# Altium PCB Gyro_Mode.PcbDoc
Units mm, origin at the board's own origin, x right, y up, seen from the top; angles counter-clockwise.
Board outline 70 x 86 mm, 2 copper layers (Top Layer, Bottom Layer); 35 components, 99 nets, 270 pads, 92 vias.
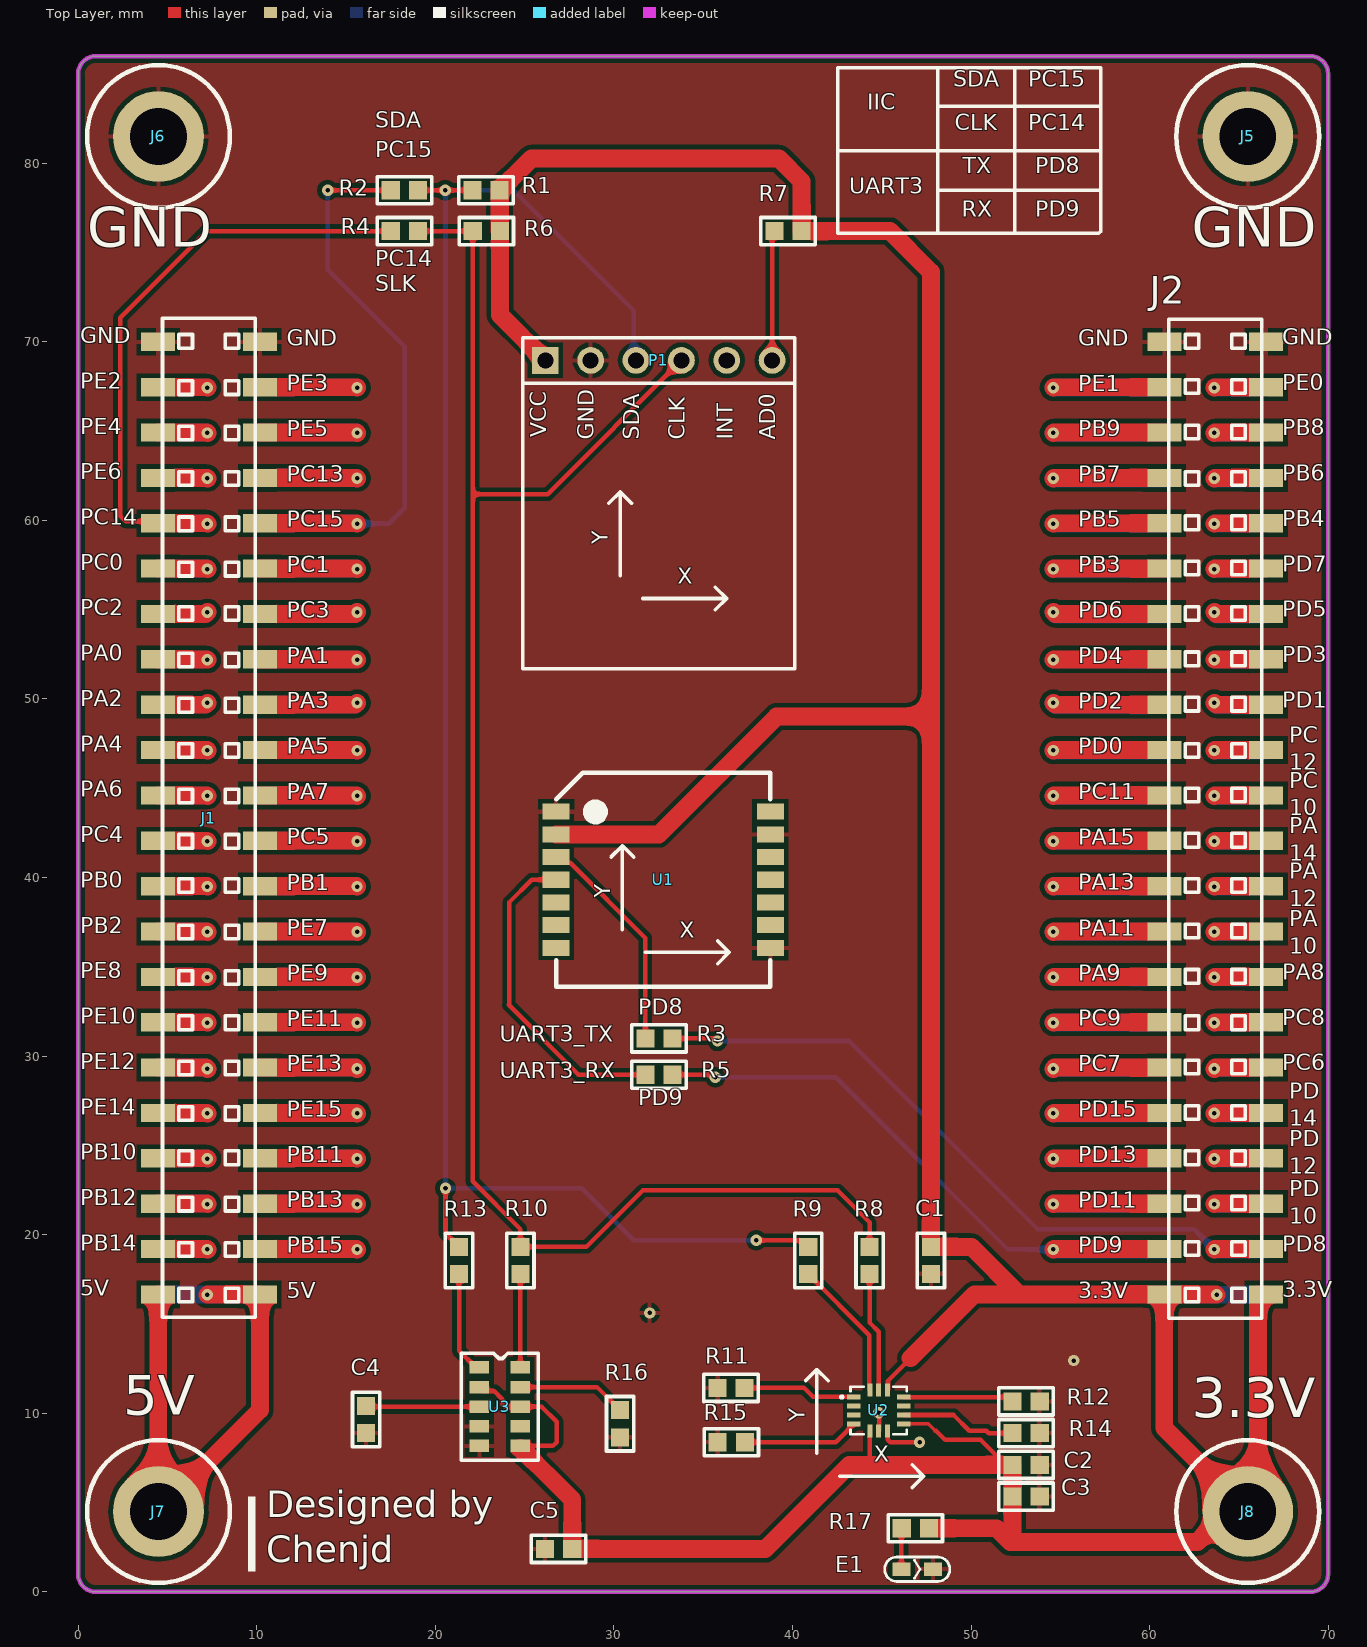
[diagram p0: Top Layer view]
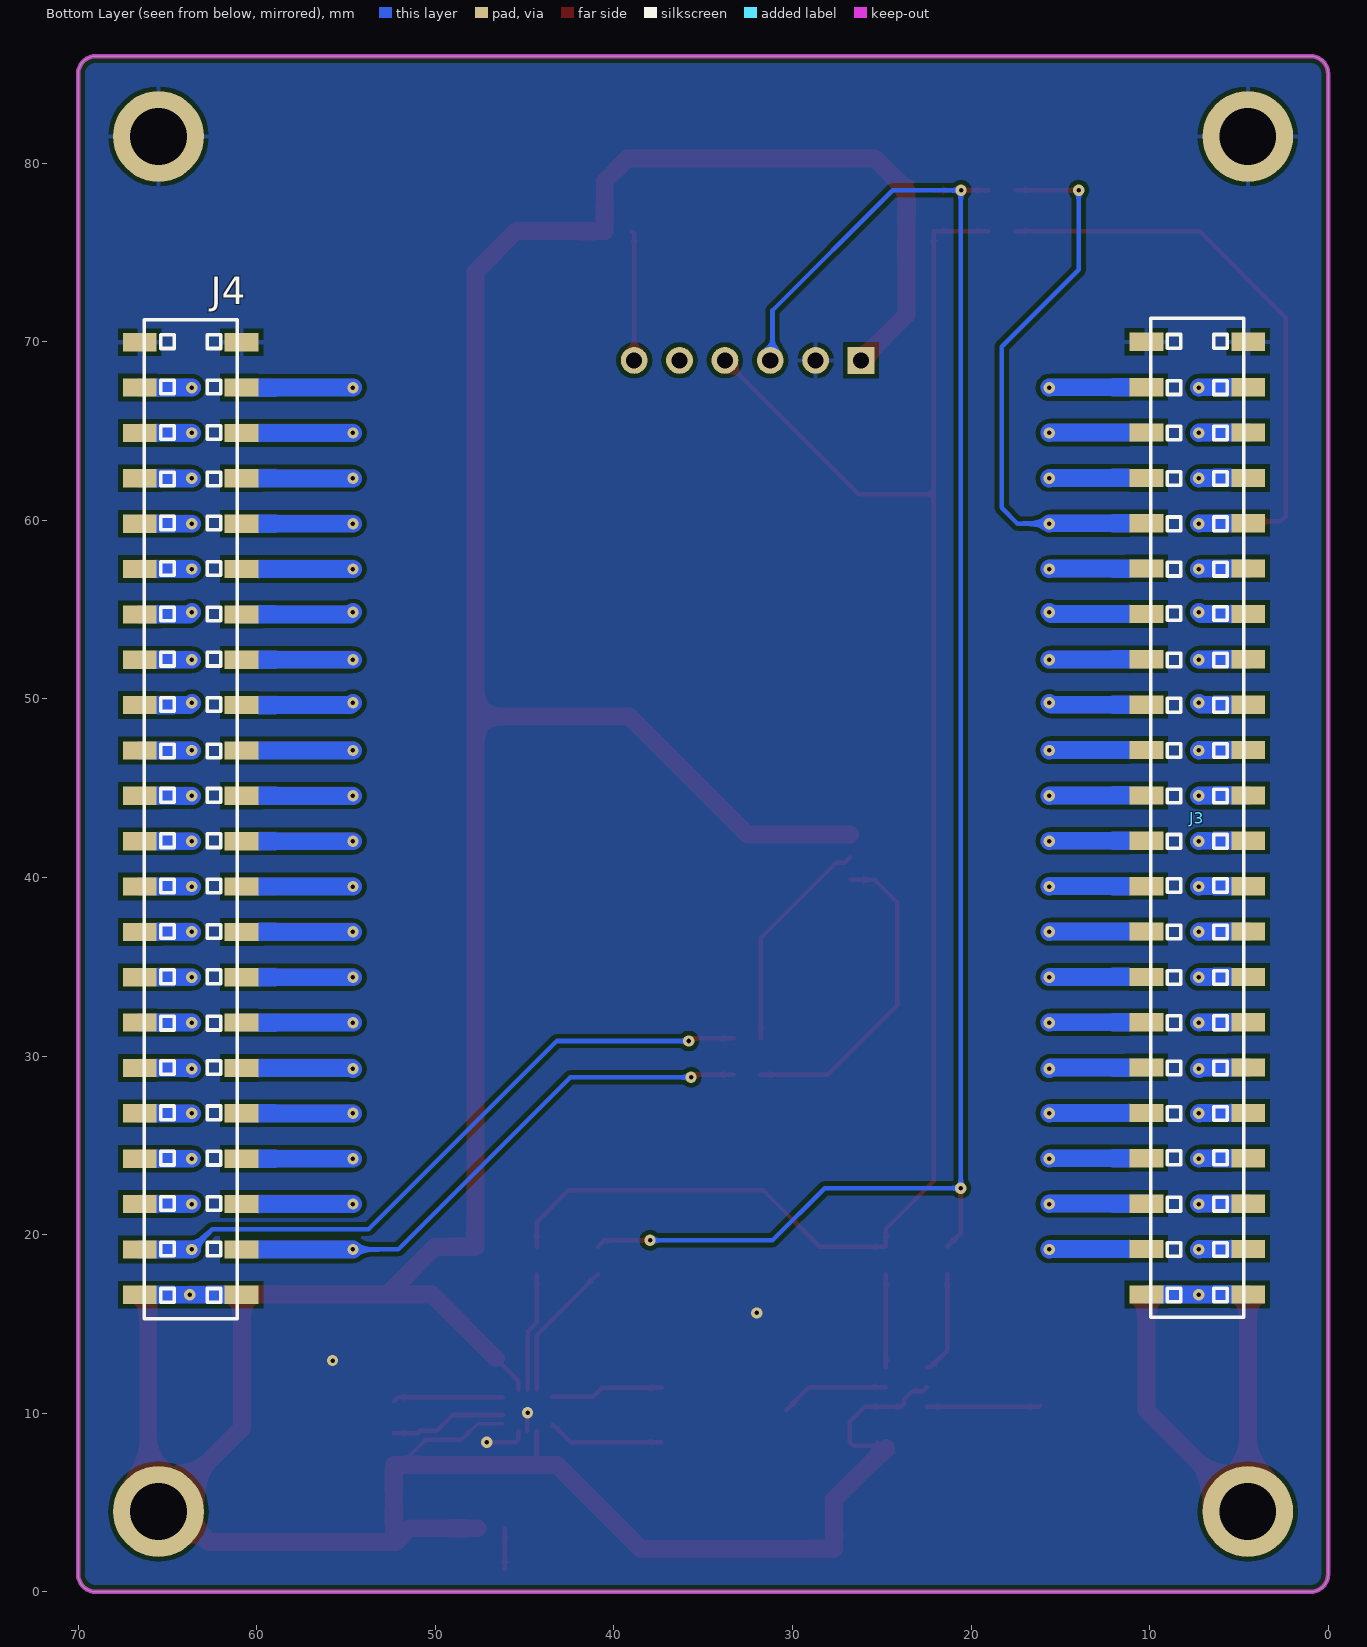
[diagram p1: Bottom Layer view, seen from below]

## Layer stack, top to bottom
Top Solder: solder mask 0.0102, Solder Resist, Dk 3.5
Top Layer: signal copper 0.0356
Dielectric 1: dielectric 0.32, FR-4, Dk 4.8
Bottom Layer: signal copper 0.0356
Bottom Solder: solder mask 0.0102, Solder Resist, Dk 3.5

## Board outline
0,1 0,85 cw(c1,85) 1,86 69,86 cw(c69,85) 70,85 70,1 cw(c69,1) 69,0 1,0 cw(c1,1)

## Design rules (kind name [scope] priority, off if disabled: settings)
Clearance [All] p1: gap=0.254 ignorepadtopadclearanceinfootprint=FALSE except(0: Arc-Hole Track-Hole SMDPad-Hole THPad-Hole Via-Hole Fill-Hole Poly-Hole Region-Hole Text-Hole)
PolygonConnect [All] p1: connectstyle=Relief reliefconductorwidth=0.254 reliefentries=4 polygonreliefangle="90 Angle" airgapwidth=0.254
RoutingVias [All] p1: holewidth=0.711 width=1.27 viastyle="Through Hole" minholewidth=0.711 minwidth=1.27 maxholewidth=0.711 maxwidth=1.27
SolderMaskExpansion [All] p1: expansion=0.102 istentingtop=FALSE
Width [All] p1: maxlimit=1 minlimit=0.254 preferedwidth=0.254
30 further rules are at their usual default settings.

## Components (designator, comment, footprint, x,y, rotation, side; value= is the part's Value field where it differs from the comment)
C1 "10uF" 0603 47.746,17.815 r90 top
C2 "10uF" 0603 53.831,7.106 r180 top
C3 "10uF" 0603 53.831,5.328 r180 top
C4 "10uF" 0603 16.123,8.907 r90 top
C5 "10uF" 0603 26.162,2.413 r0 top
E1 "LED" LED_0603L 45.847,1.27 r0 top
J1 "Pin HDR2X22" "PIN HDR2X22/2.54SMD" 6,70 r270 top
J2 "Pin HDR2X22" "PIN HDR2X22/2.54SMD" 65,16.66 r90 top
J3 "Pin HDR2X22" "PIN HDR2X22/2.54SMD" 8.652,70 r270 bottom
J4 "Pin HDR2X22" "PIN HDR2X22/2.54SMD" 62.372,16.637 r90 bottom
J5 "J?" 固定柱 65.5,81.5 r0 top
J6 "J?" 固定柱 4.5,81.5 r0 top
J7 "J?" 固定柱 4.5,4.5 r0 top
J8 "J?" 固定柱 65.5,4.5 r0 top
P1 "ATK-MPU6050" ATK-MPU6080 26.162,68.961 r0 top
R1 "10K" 0603 22.098,78.492 r0 top
R2 "0" 0603 17.526,78.492 r0 top
R3 "0" 0603 33.274,30.988 r180 top
R4 "0" 0603 17.526,76.206 r0 top
R5 "0" 0603 33.274,28.956 r180 top
R6 "10K" 0603 23.605,76.194 r180 top
R7 "0" 0603 40.496,76.194 r180 top
R8 "0" 0603 44.326,19.304 r270 top
R9 "0" 0603 40.894,19.304 r270 top
R10 "0" 0603 24.771,19.304 r270 top
R11 "5k" 0603 35.814,11.43 r0 top
R12 "0" 0603 52.341,10.674 r0 top
R13 "0" 0603 21.336,19.304 r270 top
R14 "10k" 0603 52.341,8.896 r0 top
R15 "10k" 0603 35.831,8.388 r0 top
R16 "10k" 0603 30.353,10.16 r270 top
R17 "10k" 0603 47.625,3.556 r180 top
U1 "HI2XX" HI2XX_PLCC28 32.766,39.878 r0 top
U2 "ICM40608" ICM40608-LGA-14 44.831,10.16 r0 top
U3 "XV7001" XV7001 24.765,12.571 r270 top

## Footprints (in the part's own frame and the unit in brackets; to place one, negate y for a bottom-side part, rotate by r counter-clockwise, add the part's x,y. Pads: shape width x height; smd on the part's side, far side on the other; paste and mask are expansions set on the pad)
0603 [mil] "0603封装"
  rect 40x40 smd: 1(-0.68,-0.23) 2(59.32,-0.23)
  silkscreen extent -31,-30 89,30, body extent -1,-16 62,16, height 18
ATK-MPU6080 [mm]
  rect 1.5x1.5 hole 0.9: 1(0,0)
  round 1.5 hole 0.9: 2(2.54,0) 3(5.08,0) 4(7.62,0) 5(10.16,0) 6(12.7,0)
  silkscreen extent -1.27,-17.27 13.97,1.27
HI2XX_PLCC28 [mm]
  rect 1.5x0.9 smd: 5(-6,3.81) 6(-6,2.54) 7(-6,1.27) 8(-6,0) 9(-6,-1.27) 10(-6,-2.54) 11(-6,-3.81) 19(6,-3.81) 20(6,-2.54) 21(6,-1.27) 22(6,0) 23(6,1.27) 24(6,2.54) 25(6,3.81)
  silkscreen extent -6,-6 6,6
ICM40608-LGA-14 [mm]
  rect 0.745x0.28 smd: 1(-1.398,0.75) 2(-1.398,0.25) 3(-1.398,-0.25) 4(-1.398,-0.75) 8(1.398,-0.75) 9(1.398,-0.25) 10(1.398,0.25) 11(1.398,0.75)
  rect 0.28x0.745 smd: 5(-0.5,-1.147) 6(0,-1.147) 7(0.5,-1.147) 12(0.5,1.147) 13(0,1.147) 14(-0.5,1.147)
  silkscreen extent -2.14,-1.33 1.58,1.33
LED_0603L [mil] "LED"
  rect 40x30 smd: 1(10,0) 2(80,0)
  silkscreen extent -27,-27 117,27, body extent 14,-16 77,16, height 24
"PIN HDR2X22/2.54SMD" [mm] "22pin双排2.54贴片"
  rect 1.02x1.9 smd: 1(0,-1.524) 2(0,4.176) 3(2.54,-1.524) 4(2.54,4.176) 5(5.08,-1.524) 6(5.08,4.176) 7(7.62,-1.524) 8(7.62,4.176) 9(10.16,-1.524) 10(10.16,4.176) 11(12.7,-1.524) 12(12.7,4.176) 13(15.24,-1.524) 14(15.24,4.176) 15(17.78,-1.524) 16(17.78,4.176) 17(20.32,-1.524) 18(20.32,4.176) 19(22.86,-1.524) 20(22.86,4.176) 21(25.4,-1.524) 22(25.4,4.176) 23(27.94,-1.524) 24(27.94,4.176) 25(30.48,-1.524) 26(30.48,4.176) 27(33.02,-1.524) 28(33.02,4.176) 29(35.56,-1.524) 30(35.56,4.176) 31(38.1,-1.524) 32(38.1,4.176) 33(40.64,-1.524) 34(40.64,4.176) 35(43.18,-1.524) 36(43.18,4.176) 37(45.72,-1.524) 38(45.72,4.176) 39(48.26,-1.524) 40(48.26,4.176) 41(50.8,-1.524) 42(50.8,4.176) 43(53.34,-1.524) 44(53.34,4.176)
  silkscreen extent -1.33,-1.27 54.61,3.93, body extent -1.27,-1.78 54.67,4.62, height 5.15
XV7001 [mm] "爱普生陀螺仪"
  rect 0.7x1.1 smd: 1(0,-2.3) 2(1.1,-2.3) 3(2.2,-2.3) 4(3.3,-2.3) 5(4.4,-2.3) 6(4.4,0) 7(3.3,0) 8(2.2,0) 9(1.1,0) 10(0,0)
  silkscreen extent -0.8,-3.3 5.2,1
固定柱 [mm] "固定柱"
  round 5.08 hole 3.175: 1(0,0)
  silkscreen extent -4,-4 4,4, body extent -2.7,-2.35 2.7,2.35, height 10.05

## Part data
C1 C2 C3 C4 C5: library part "CAP Nonpolarity", "无极电容"
E1: "LED灯"
J1 J2 J3 J4: "22pin双排2.54接口"
J5 J6 J7 J8: library part 固定柱, "固定柱"
R1 R2 R3 R4 R5 R6 R7 R8 R9 R10 R11 R12 R13 R14 R15 R16 R17: library part R, "电阻"
U1: "HI226"
U3: "爱普生陀螺仪"
P1: LatestRevisionDate=17-Jul-2002, LatestRevisionNote="Re-released for DXP Platform.", Publisher="Altium Limited"

## Via types
v1: diameter 0.635, hole 0.254, Top Layer to Bottom Layer, tented both sides, 92 vias

## Nets (pads, with @x,y where several pads share a name; then routed paths per layer and width w, separated by ;. In a path a pad name is that pad's centre, name@x,y a point inside that pad or via, vN(x,y) a via of type N, cw(c..) or ccw(c..) an arc to the next point about the centre after c; other vN are vias at no path point)
GND: C1.1 C2.1 C3.1 C4.1 C5.1 E1.2 J1.1 J1.2 J2.43 J2.44 J3.1 J3.2 J4.43 J4.44 J5.1 J6.1 P1.2 R11.1 R12.2 R14.2 R15.1 R16.2 U1.5 U1.19 U1.24 U2.6 U2.7 U3.4 U3.5 | length 3.4
  Top Layer w0.254: v1(44.831,10.033) 44.852,10.012 U2.6@44.852,9.013 ; U2.7 45.344,8.999 45.344,8.518 45.48,8.382 v1(47.117,8.382)
  other v1: 55.753,12.954 32.004,15.621
IIC_SDA: P1.3 R1.1 R2.2 R9.1 R13.1 | length 100.4
  Top Layer w0.254: R2.2 v1(20.557,78.486) R1.1 ; v1(20.574,22.606) 20.574,20.077 R13.1 ; v1(37.971,19.685) 40.524,19.685 R9.1
  Bottom Layer w0.254: P1.3 31.115,69.088 31.115,71.755 24.384,78.486 v1(20.557,78.486) 20.574,78.469 v1(20.574,22.606) 28.194,22.606 31.115,19.685 v1(37.971,19.685)
IIC_SLK: P1.4 R4.2 R6.2 R8.1 R10.1 | length 98.8
  Top Layer w0.254: R4.2 R6.2 22.098,61.468 ; P1.4 26.289,61.468 22.098,61.468 ; R8.1 44.32,20.704 42.545,22.479 31.623,22.479 28.465,19.321 R10.1 24.765,20.32 22.098,22.987 22.098,61.468
NetC4_2: C4.2 U3.3 | length 6.4
  Top Layer w0.254: C4.2 16.172,10.371 U3.3
NetE1_1: E1.1 R17.2 | length 2.3
  Top Layer w0.254: E1.1 46.101,3.545 R17.2
NetP1_6: P1.6 R7.2 | length 7.3
  Top Layer w0.254: P1.6 38.862,76.073 R7.2
NetR3_2: R3.2 U1.7 | length 12.5
  Top Layer w0.254: U1.7 27.089,40.825 27.558,40.825 31.767,36.615 R3.2
NetR5_2: R5.2 U1.8 | length 18.2
  Top Layer w0.254: U1.8 25.4,39.878 24.13,38.608 24.13,32.893 24.108,32.871 28.017,28.962 R5.2
NetR8_2: R8.2 U2.13 | length 6.7
  Top Layer w0.254: R8.2 44.32,15.084 44.831,14.573 U2.13
NetR9_2: R9.2 U2.14 | length 7.9
  Top Layer w0.254: R9.2 44.31,14.375 U2.14@44.31,11.307
NetR10_2: R10.2 U3.10 | length 5.2
  Top Layer w0.254: U3.10 R10.2
NetR11_2: R11.2 U2.1 | length 6.3
  Top Layer w0.254: R11.2 40.646,11.424 41.148,10.922 42.286,10.922 42.295,10.931 U2.1@43.433,10.931
NetR12_1: R12.1 U2.11 | length 6.2
  Top Layer w0.254: U2.11 52.082,10.91 R12.1
NetR13_2: R13.2 U3.1 | length 5.8
  Top Layer w0.254: R13.2 21.33,13.506 22.265,12.571 U3.1
NetR14_1: R14.1 U2.9 | length 6.5
  Top Layer w0.254: U2.9@46.229,9.906 49.022,9.906 49.911,9.017 50.863,9.017 50.99,8.89 R14.1
NetR15_2: R15.2 U2.4 | length 6.5
  Top Layer w0.254: R15.2 42.427,8.382 U2.4@43.433,9.389
NetR16_1: R16.1 U3.9 | length 6.1
  Top Layer w0.254: U3.9 29.053,11.471 R16.1
PA0: J1.15 J3.16 | length 5.6
  Top Layer w0.254: J1.15 J1.15@4.499,52.197
  Top Layer w1: J1.15 7.216,52.22 v1(7.239,52.197)
  Bottom Layer w1: J3.16 7.216,52.22 v1(7.239,52.197)
PA1: J1.16 J3.15 | length 10.9
  Top Layer w0.254: J1.16 J1.16@10.199,52.197
  Top Layer w1: J1.16 15.598,52.22 v1(15.621,52.197)
  Bottom Layer w1: J3.15 15.598,52.22 v1(15.621,52.197)
PA2: J1.17 J3.18 | length 5.8
  Top Layer w0.254: J1.17 J1.17@4.58,49.784
  Top Layer w1: J1.17 7.135,49.68 v1(7.239,49.784)
  Bottom Layer w1: J3.18 7.135,49.68 v1(7.239,49.784)
PA3: J1.18 J3.17 | length 11.1
  Top Layer w0.254: J1.18 J1.18@10.28,49.784
  Top Layer w1: J1.18 15.517,49.68 v1(15.621,49.784)
  Bottom Layer w1: J3.17 15.517,49.68 v1(15.621,49.784)
PA4: J1.19 J3.20 | length 5.6
  Top Layer w0.254: J1.19 J1.19@4.499,47.117
  Top Layer w1: J1.19 7.216,47.14 v1(7.239,47.117)
  Bottom Layer w1: J3.20 7.216,47.14 v1(7.239,47.117)
PA5: J1.20 J3.19 | length 10.9
  Top Layer w0.254: J1.20 J1.20@10.199,47.117
  Top Layer w1: J1.20 15.598,47.14 v1(15.621,47.117)
  Bottom Layer w1: J3.19 15.598,47.14 v1(15.621,47.117)
PA6: J1.21 J3.22 | length 5.6
  Top Layer w0.254: J1.21 J1.21@4.499,44.577
  Top Layer w1: J1.21 7.216,44.6 v1(7.239,44.577)
  Bottom Layer w1: J3.22 7.216,44.6 v1(7.239,44.577)
PA7: J1.22 J3.21 | length 10.9
  Top Layer w0.254: J1.22 J1.22@10.199,44.577
  Top Layer w1: J1.22 15.598,44.6 v1(15.621,44.577)
  Bottom Layer w1: J3.21 15.598,44.6 v1(15.621,44.577)
PA8: J2.15 J4.16 | length 5.8
  Top Layer w1: v1(63.627,34.417) 63.65,34.44 J2.15
  Bottom Layer w1: v1(63.627,34.417) J4.16
PA9: J2.16 J4.15 | length 12.5
  Top Layer w1: v1(54.61,34.417) 54.633,34.44 J2.16
  Bottom Layer w1: v1(54.61,34.417) J4.15
PA10: J2.17 J4.18 | length 5.8
  Top Layer w1: v1(63.627,36.957) 63.65,36.98 J2.17
  Bottom Layer w1: v1(63.627,36.957) J4.18
PA11: J2.18 J4.17 | length 12.5
  Top Layer w1: v1(54.61,36.957) 54.633,36.98 J2.18
  Bottom Layer w1: v1(54.61,36.957) J4.17
PA12: J2.19 J4.20 | length 5.8
  Top Layer w1: v1(63.627,39.497) 63.65,39.52 J2.19
  Bottom Layer w1: v1(63.627,39.497) J4.20
PA13: J2.20 J4.19 | length 12.5
  Top Layer w1: v1(54.61,39.497) 54.633,39.52 J2.20
  Bottom Layer w1: v1(54.61,39.497) J4.19
PA14: J2.21 J4.22 | length 5.8
  Top Layer w1: v1(63.627,42.037) 63.65,42.06 J2.21
  Bottom Layer w1: v1(63.627,42.037) J4.22
PA15: J2.22 J4.21 | length 12.5
  Top Layer w1: v1(54.61,42.037) 54.633,42.06 J2.22
  Bottom Layer w1: v1(54.61,42.037) J4.21
PB0: J1.25 J3.26 | length 5.6
  Top Layer w0.254: J1.25 J1.25@4.499,39.497
  Top Layer w1: J1.25 7.216,39.52 v1(7.239,39.497)
  Bottom Layer w1: J3.26 7.216,39.52 v1(7.239,39.497)
PB1: J1.26 J3.25 | length 10.9
  Top Layer w0.254: J1.26 J1.26@10.199,39.497
  Top Layer w1: J1.26 15.598,39.52 v1(15.621,39.497)
  Bottom Layer w1: J3.25 15.598,39.52 v1(15.621,39.497)
PB2: J1.27 J3.28 | length 5.6
  Top Layer w0.254: J1.27 J1.27@4.499,36.957
  Top Layer w1: J1.27 7.216,36.98 v1(7.239,36.957)
  Bottom Layer w1: J3.28 7.216,36.98 v1(7.239,36.957)
PB3: J2.34 J4.33 | length 12.5
  Top Layer w1: v1(54.61,57.277) 54.633,57.3 J2.34
  Bottom Layer w1: v1(54.61,57.277) J4.33
PB4: J2.35 J4.36 | length 5.8
  Top Layer w1: v1(63.627,59.817) 63.65,59.84 J2.35
  Bottom Layer w1: v1(63.627,59.817) J4.36
PB5: J2.36 J4.35 | length 12.5
  Top Layer w1: v1(54.61,59.817) 54.633,59.84 J2.36
  Bottom Layer w1: v1(54.61,59.817) J4.35
PB6: J2.37 J4.38 | length 5.8
  Top Layer w1: v1(63.627,62.357) 63.65,62.38 J2.37
  Bottom Layer w1: v1(63.627,62.357) J4.38
PB7: J2.38 J4.37 | length 12.5
  Top Layer w1: v1(54.61,62.357) 54.633,62.38 J2.38
  Bottom Layer w1: v1(54.61,62.357) J4.37
PB8: J2.39 J4.40 | length 5.8
  Top Layer w1: v1(63.627,64.897) 63.65,64.92 J2.39
  Bottom Layer w1: v1(63.627,64.897) J4.40
PB9: J2.40 J4.39 | length 12.5
  Top Layer w1: v1(54.61,64.897) 54.633,64.92 J2.40
  Bottom Layer w1: v1(54.61,64.897) J4.39
PB10: J1.37 J3.38 | length 5.6
  Top Layer w0.254: J1.37 J1.37@4.499,24.257
  Top Layer w1: J1.37 7.216,24.28 v1(7.239,24.257)
  Bottom Layer w1: J3.38 7.216,24.28 v1(7.239,24.257)
PB11: J1.38 J3.37 | length 10.9
  Top Layer w0.254: J1.38 J1.38@10.199,24.257
  Top Layer w1: J1.38 15.598,24.28 v1(15.621,24.257)
  Bottom Layer w1: J3.37 15.598,24.28 v1(15.621,24.257)
PB12: J1.39 J3.40 | length 5.6
  Top Layer w0.254: J1.39 J1.39@4.499,21.717
  Top Layer w1: J1.39 7.216,21.74 v1(7.239,21.717)
  Bottom Layer w1: J3.40 7.216,21.74 v1(7.239,21.717)
PB13: J1.40 J3.39 | length 10.9
  Top Layer w1: J1.40 15.598,21.74 v1(15.621,21.717)
  Bottom Layer w1: J3.39 15.598,21.74 v1(15.621,21.717)
PB14: J1.41 J3.42 | length 5.5
  Top Layer w1: J1.41 7.216,19.2 v1(7.239,19.177)
  Bottom Layer w1: J3.42 7.216,19.2 v1(7.239,19.177)
PB15: J1.42 J3.41 | length 10.9
  Top Layer w1: J1.42 15.598,19.2 v1(15.621,19.177)
  Bottom Layer w1: J3.41 15.598,19.2 v1(15.621,19.177)
PC0: J1.11 J3.12 | length 5.5
  Top Layer w1: J1.11 7.216,57.3 v1(7.239,57.277)
  Bottom Layer w1: J3.12 7.216,57.3 v1(7.239,57.277)
PC1: J1.12 J3.11 | length 10.9
  Top Layer w0.254: J1.12 J1.12@10.199,57.277
  Top Layer w1: J1.12 15.598,57.3 v1(15.621,57.277)
  Bottom Layer w1: J3.11 15.598,57.3 v1(15.621,57.277)
PC2: J1.13 J3.14 | length 5.8
  Top Layer w0.254: J1.13 J1.13@4.58,54.864
  Top Layer w1: J1.13 7.135,54.76 v1(7.239,54.864)
  Bottom Layer w1: J3.14 7.135,54.76 v1(7.239,54.864)
PC3: J1.14 J3.13 | length 11.1
  Top Layer w0.254: J1.14 J1.14@10.28,54.864
  Top Layer w1: J1.14 15.517,54.76 v1(15.621,54.864)
  Bottom Layer w1: J3.13 15.517,54.76 v1(15.621,54.864)
PC4: J1.23 J3.24 | length 5.6
  Top Layer w0.254: J1.23 J1.23@4.499,42.037
  Top Layer w1: J1.23 7.216,42.06 v1(7.239,42.037)
  Bottom Layer w1: J3.24 7.216,42.06 v1(7.239,42.037)
PC5: J1.24 J3.23 | length 10.9
  Top Layer w0.254: J1.24 J1.24@10.199,42.037
  Top Layer w1: J1.24 15.598,42.06 v1(15.621,42.037)
  Bottom Layer w1: J3.23 15.598,42.06 v1(15.621,42.037)
PC6: J2.11 J4.12 | length 5.9
  Top Layer w1: v1(63.627,29.289) 63.698,29.36 J2.11
  Bottom Layer w1: v1(63.627,29.289) 63.675,29.337 J4.12
PC7: J2.12 J4.11 | length 12.5
  Top Layer w1: v1(54.61,29.289) 54.681,29.36 J2.12
  Bottom Layer w1: v1(54.61,29.289) 54.658,29.337 J4.11
PC8: J2.13 J4.14 | length 5.8
  Top Layer w1: v1(63.627,31.877) 63.65,31.9 J2.13
  Bottom Layer w1: v1(63.627,31.877) J4.14
PC9: J2.14 J4.13 | length 12.5
  Top Layer w1: v1(54.61,31.877) 54.633,31.9 J2.14
  Bottom Layer w1: v1(54.61,31.877) J4.13
PC10: J2.23 J4.24 | length 5.8
  Top Layer w1: v1(63.627,44.577) 63.65,44.6 J2.23
  Bottom Layer w1: v1(63.627,44.577) J4.24
PC11: J2.24 J4.23 | length 12.5
  Top Layer w1: v1(54.61,44.577) 54.633,44.6 J2.24
  Bottom Layer w1: v1(54.61,44.577) J4.23
PC12: J2.25 J4.26 | length 5.8
  Top Layer w1: v1(63.627,47.117) 63.65,47.14 J2.25
  Bottom Layer w1: v1(63.627,47.117) J4.26
PC13: J1.8 J3.7 | length 10.9
  Top Layer w0.254: J1.8 J1.8@10.199,62.357
  Top Layer w1: J1.8 15.598,62.38 v1(15.621,62.357)
  Bottom Layer w1: J3.7 15.598,62.38 v1(15.621,62.357)
PC14: J1.9 J3.10 R4.1 | length 36.1
  Top Layer w0.254: J1.9 4.372,59.944 2.667,59.944 2.366,60.245 2.366,71.358 7.208,76.2 R4.1
  Top Layer w1: J1.9 7.216,59.84 v1(7.239,59.817)
  Bottom Layer w1: J3.10 7.216,59.84 v1(7.239,59.817)
PC15: J1.10 J3.9 R2.1 | length 37.3
  Top Layer w0.254: J1.10 J1.10@10.199,59.817 ; v1(13.97,78.486) R2.1
  Top Layer w1: J1.10 15.598,59.84 v1(15.621,59.817)
  Bottom Layer w0.254: J3.9 J3.9@10.326,59.69 ; v1(13.97,78.486) 13.97,74.041 18.288,69.723 18.288,60.706 17.399,59.817 v1(15.621,59.817)
  Bottom Layer w1: J3.9 15.598,59.84 v1(15.621,59.817)
PD0: J2.26 J4.25 | length 12.5
  Top Layer w1: v1(54.61,47.117) 54.633,47.14 J2.26
  Bottom Layer w1: v1(54.61,47.117) J4.25
PD1: J2.27 J4.28 | length 5.9
  Top Layer w1: v1(63.627,49.784) 63.731,49.68 J2.27
  Bottom Layer w1: v1(63.627,49.784) 63.754,49.657 J4.28
PD2: J2.28 J4.27 | length 12.5
  Top Layer w1: v1(54.61,49.784) 54.714,49.68 J2.28
  Bottom Layer w1: v1(54.61,49.784) 54.737,49.657 J4.27
PD3: J2.29 J4.30 | length 5.8
  Top Layer w1: v1(63.627,52.197) 63.65,52.22 J2.29
  Bottom Layer w1: v1(63.627,52.197) J4.30
PD4: J2.30 J4.29 | length 12.5
  Top Layer w1: v1(54.61,52.197) 54.633,52.22 J2.30
  Bottom Layer w1: v1(54.61,52.197) J4.29
PD5: J2.31 J4.32 | length 5.9
  Top Layer w1: v1(63.627,54.864) 63.731,54.76 J2.31
  Bottom Layer w1: v1(63.627,54.864) 63.754,54.737 J4.32
PD6: J2.32 J4.31 | length 12.5
  Top Layer w1: v1(54.61,54.864) 54.714,54.76 J2.32
  Bottom Layer w1: v1(54.61,54.864) 54.737,54.737 J4.31
PD7: J2.33 J4.34 | length 5.8
  Top Layer w1: v1(63.627,57.277) 63.65,57.3 J2.33
  Bottom Layer w1: v1(63.627,57.277) J4.34
PD8: J2.3 J4.4 R3.1 | length 41.1
  Top Layer w0.254: R3.1 35.555,30.994 35.699,30.849 v1(35.802,30.849)
  Top Layer w1: v1(63.627,19.177) 63.65,19.2 J2.3
  Bottom Layer w0.254: v1(35.802,30.849) 43.192,30.849 53.721,20.32 62.484,20.32 v1(63.627,19.177)
  Bottom Layer w1: v1(63.627,19.177) J4.4
PD9: J2.4 J4.3 R5.1 | length 37.8
  Top Layer w0.254: R5.1 35.428,28.962 35.572,28.817 v1(35.675,28.817)
  Top Layer w1: v1(54.61,19.177) 54.633,19.2 J2.4
  Bottom Layer w0.254: v1(35.675,28.817) 42.43,28.817 52.07,19.177 v1(54.61,19.177)
  Bottom Layer w1: v1(54.61,19.177) J4.3
PD10: J2.5 J4.6 | length 5.8
  Top Layer w1: v1(63.627,21.717) 63.65,21.74 J2.5
  Bottom Layer w1: v1(63.627,21.717) J4.6
PD11: J2.6 J4.5 | length 12.5
  Top Layer w1: v1(54.61,21.717) 54.633,21.74 J2.6
  Bottom Layer w1: v1(54.61,21.717) J4.5
PD12: J2.7 J4.8 | length 5.8
  Top Layer w1: v1(63.627,24.257) 63.65,24.28 J2.7
  Bottom Layer w1: v1(63.627,24.257) J4.8
PD13: J2.8 J4.7 | length 12.5
  Top Layer w1: v1(54.61,24.257) 54.633,24.28 J2.8
  Bottom Layer w1: v1(54.61,24.257) J4.7
PD14: J2.9 J4.10 | length 5.8
  Top Layer w1: v1(63.627,26.797) 63.65,26.82 J2.9
  Bottom Layer w1: v1(63.627,26.797) J4.10
PD15: J2.10 J4.9 | length 12.5
  Top Layer w1: v1(54.61,26.797) 54.633,26.82 J2.10
  Bottom Layer w1: v1(54.61,26.797) J4.9
PE0: J2.41 J4.42 | length 5.8
  Top Layer w1: v1(63.627,67.437) 63.65,67.46 J2.41
  Bottom Layer w1: v1(63.627,67.437) J4.42
PE1: J2.42 J4.41 | length 12.5
  Top Layer w1: v1(54.61,67.437) 54.633,67.46 J2.42
  Bottom Layer w1: v1(54.61,67.437) J4.41
PE2: J1.3 J3.4 | length 5.6
  Top Layer w0.254: J1.3 J1.3@4.499,67.437
  Top Layer w1: J1.3 7.216,67.46 v1(7.239,67.437)
  Bottom Layer w1: J3.4 7.216,67.46 v1(7.239,67.437)
PE3: J1.4 J3.3 | length 10.9
  Top Layer w0.254: J1.4 J1.4@10.199,67.437
  Top Layer w1: J1.4 15.598,67.46 v1(15.621,67.437)
  Bottom Layer w1: J3.3 15.598,67.46 v1(15.621,67.437)
PE4: J1.5 J3.6 | length 5.6
  Top Layer w0.254: J1.5 J1.5@4.499,64.897
  Top Layer w1: J1.5 7.216,64.92 v1(7.239,64.897)
  Bottom Layer w1: J3.6 7.216,64.92 v1(7.239,64.897)
PE5: J1.6 J3.5 | length 10.9
  Top Layer w0.254: J1.6 J1.6@10.199,64.897
  Top Layer w1: J1.6 15.598,64.92 v1(15.621,64.897)
  Bottom Layer w1: J3.5 15.598,64.92 v1(15.621,64.897)
PE6: J1.7 J3.8 | length 5.6
  Top Layer w0.254: J1.7 J1.7@4.499,62.357
  Top Layer w1: J1.7 7.216,62.38 v1(7.239,62.357)
  Bottom Layer w1: J3.8 7.216,62.38 v1(7.239,62.357)
PE7: J1.28 J3.27 | length 10.9
  Top Layer w0.254: J1.28 J1.28@10.199,36.957
  Top Layer w1: J1.28 15.598,36.98 v1(15.621,36.957)
  Bottom Layer w1: J3.27 15.598,36.98 v1(15.621,36.957)
PE8: J1.29 J3.30 | length 5.6
  Top Layer w0.254: J1.29 J1.29@4.499,34.417
  Top Layer w1: J1.29 7.216,34.44 v1(7.239,34.417)
  Bottom Layer w1: J3.30 7.216,34.44 v1(7.239,34.417)
PE9: J1.30 J3.29 | length 10.9
  Top Layer w0.254: J1.30 J1.30@10.199,34.417
  Top Layer w1: J1.30 15.598,34.44 v1(15.621,34.417)
  Bottom Layer w1: J3.29 15.598,34.44 v1(15.621,34.417)
PE10: J1.31 J3.32 | length 5.6
  Top Layer w0.254: J1.31 J1.31@4.499,31.877
  Top Layer w1: J1.31 7.216,31.9 v1(7.239,31.877)
  Bottom Layer w1: J3.32 7.216,31.9 v1(7.239,31.877)
PE11: J1.32 J3.31 | length 10.9
  Top Layer w0.254: J1.32 J1.32@10.199,31.877
  Top Layer w1: J1.32 15.598,31.9 v1(15.621,31.877)
  Bottom Layer w1: J3.31 15.598,31.9 v1(15.621,31.877)
PE12: J1.33 J3.34 | length 5.7
  Top Layer w0.254: J1.33 J1.33@4.547,29.289
  Top Layer w1: J1.33 7.168,29.36 v1(7.239,29.289)
  Bottom Layer w1: J3.34 7.168,29.36 v1(7.239,29.289)
PE13: J1.34 J3.33 | length 11
  Top Layer w0.254: J1.34 J1.34@10.247,29.289
  Top Layer w1: J1.34 15.55,29.36 v1(15.621,29.289)
  Bottom Layer w1: J3.33 15.55,29.36 v1(15.621,29.289)
PE14: J1.35 J3.36 | length 5.6
  Top Layer w0.254: J1.35 J1.35@4.499,26.797
  Top Layer w1: J1.35 7.216,26.82 v1(7.239,26.797)
  Bottom Layer w1: J3.36 7.216,26.82 v1(7.239,26.797)
PE15: J1.36 J3.35 | length 10.9
  Top Layer w0.254: J1.36 J1.36@10.199,26.797
  Top Layer w1: J1.36 15.598,26.82 v1(15.621,26.797)
  Bottom Layer w1: J3.35 15.598,26.82 v1(15.621,26.797)
VCC3.3: C1.2 C2.2 C3.2 C5.2 J2.1 J2.2 J4.1 J4.2 J8.1 P1.1 R1.2 R6.1 R7.1 R17.1 U1.6 U2.5 U2.8 U2.12 U3.2 U3.6 U3.8 | length 251.9
  Top Layer w0.2: U2.8 47.613,9.41 48.006,9.017
  Top Layer w0.254: U3.2 22.688,11.248 23.296,11.248 23.749,10.795 23.749,10.541 23.919,10.371 U3.8 25.951,10.371 26.797,9.525 26.797,8.382 26.586,8.171 U3.6 ; 44.323,7.112 44.331,7.12 U2.5 ; U2.12@45.352,11.307 45.352,11.824 46.609,13.081 ; 48.006,9.017 48.041,9.017 48.549,8.509 50.546,8.509 51.61,7.445 51.991,7.445 C2.2
  Top Layer w1: U3.6@24.765,8.071 27.669,5.167 C5.2 38.475,2.407 43.18,7.112 44.323,7.112 C2.2 C3.2 52.324,2.915 52.197,2.788 ; P1.1 23.622,71.501 R6.1 23.605,76.217 R1.2 25.383,80.264 39.243,80.264 40.513,78.994 R7.1 45.466,76.2 47.752,73.914 47.752,49.022 ; U1.6 32.512,42.418 39.116,49.022 47.752,49.022 ; 46.609,13.081 50.188,16.66 52.682,16.66 ; R17.1 51.423,3.562 52.197,2.788 ; v1(63.754,16.637) 63.731,16.66 J2.2 ; J2.1 66.084,16.66 66.074,16.65 66.074,5.074 J8.1 ; 47.752,49.022 C1.2 50.021,19.321 52.682,16.66 ; 52.197,2.788 62.684,2.788 64.396,4.5 J8.1 ; 52.682,16.66 J2.2 ; J2.2 60.824,9.176 J8.1
  Bottom Layer w1: J4.1 v1(63.754,16.637) J4.2
VCC5V: J1.43 J1.44 J3.43 J3.44 J7.1 | length 35.3
  Top Layer w1: J1.43 4.478,16.66 4.488,16.65 4.488,4.512 4.512,4.512 10.176,10.176 J1.44 7.262,16.66 v1(7.239,16.637)
  Bottom Layer w1: J3.44 7.216,16.66 v1(7.239,16.637) 7.262,16.66 J3.43
pads on no net: P1.5 U1.9 U1.10 U1.11 U1.20 U1.21 U1.22 U1.23 U1.25 U2.2 U2.3 U2.10 U3.7

## Polygon pours and split planes (outlines as drawn)
GND on Bottom Layer "GND_L02_P001" (solid, remove dead copper, pour order 1): 0,0 69.977,0 70,0.023 70,85.956 69.956,86 0.021,86 0,85.979
GND on Top Layer "GND_L01_P000" (solid, remove dead copper, pour order 0): 0,0 69.977,0 70,0.023 70,85.956 69.956,86 0.021,86 0,85.979

## Keep-outs
Keep-Out Layer:
  the board outline again, w0.254

## Silkscreen, mask and mechanical layers (free items; w line width, h text height)
Top Overlay:
  rectangle: 9.525,1.142 9.931,5.333
  lines w0.2: 40.736,11.816 41.371,12.451 ; 41.371,7.752 41.371,12.451 ; 42.006,11.816 41.371,12.451 ; 42.545,80.709 57.213,80.709 ; 42.641,6.482 47.34,6.482 ; 46.705,5.847 47.34,6.482 ; 46.705,7.117 47.34,6.482 ; 48.133,76.073 48.133,85.344 ; 48.133,78.486 57.277,78.486 ; 48.133,83.185 57.277,83.185 ; 52.451,76.073 52.451,85.344 ; 42.545,76.073 42.545,85.344 53.721,85.344 57.277,85.344 57.277,76.2 57.15,76.073 42.545,76.073
  text "SDA" at 49.009,83.964 h1.52
  text "PC15" at 53.212,83.964 h1.52
  text "IIC" at 44.196,82.694 h1.52
  text "SDA" at 16.637,81.678 h1.52
  text "CLK" at 49.089,81.551 h1.52
  text "PC14" at 53.218,81.544 h1.52
  text "PC15" at 16.637,80.027 h1.52
  text "TX" at 49.53,79.121 h1.52
  text "PD8" at 53.594,79.124 h1.52
  text "UART3" at 43.18,77.995 h1.52
  text "RX" at 49.492,76.708 h1.52
  text "PD9" at 53.594,76.704 h1.52
  text "GND" at 0.508,74.591 h3.81
  text "GND" at 62.357,74.591 h3.81
  text "PC14" at 16.637,73.931 h1.52
  text "SLK" at 16.637,72.534 h1.52
  text "GND" at 0.127,69.613 h1.52
  text "GND" at 67.437,69.535 h1.52
  text "GND" at 11.684,69.486 h1.52
  text "GND" at 56.007,69.486 h1.52
  text "PE2" at 0.127,67.056 h1.52
  text "PE0" at 67.437,66.995 h1.52
  text "PE3" at 11.684,66.946 h1.52
  text "PE1" at 56.007,66.929 h1.52
  text "PE4" at 0.127,64.516 h1.52
  text "PB8" at 67.437,64.454 h1.52
  text "PE5" at 11.684,64.406 h1.52
  text "PB9" at 56.007,64.405 h1.52
  text "PE6" at 0.127,61.993 h1.52
  text "PB6" at 67.437,61.914 h1.52
  text "PC13" at 11.684,61.866 h1.52
  text "PB7" at 56.007,61.848 h1.52
  text "PC14" at 0.127,59.453 h1.52
  text "PB4" at 67.437,59.357 h1.52
  text "PC15" at 11.684,59.326 h1.52
  text "PB5" at 56.007,59.325 h1.52
  text "PC0" at 0.127,56.913 h1.52
  text "PD7" at 67.437,56.817 h1.52
  text "PC1" at 11.684,56.786 h1.52
  text "PB3" at 56.007,56.785 h1.52
  text "PC2" at 0.127,54.373 h1.52
  text "PD5" at 67.437,54.294 h1.52
  text "PC3" at 11.684,54.246 h1.52
  text "PD6" at 56.007,54.245 h1.52
  text "PA0" at 0.127,51.833 h1.52
  text "PD3" at 67.437,51.753 h1.52
  text "PA1" at 11.684,51.689 h1.52
  text "PD4" at 56.007,51.688 h1.52
  text "PA2" at 0.127,49.276 h1.52
  text "PD1" at 67.437,49.196 h1.52
  text "PA3" at 11.684,49.166 h1.52
  text "PD2" at 56.007,49.147 h1.52
  text "PA4" at 0.127,46.736 h1.52
  text "PA5" at 11.684,46.626 h1.52
  text "PD0" at 56.007,46.624 h1.52
  text "PC / 12" at 67.818,45.72 h1.52
  text "PA6" at 0.127,44.213 h1.52
  text "PC11" at 56.007,44.084 h1.52
  text "PA7" at 11.684,44.069 h1.52
  text "PC / 10" at 67.818,43.18 h1.52
  text "PC4" at 0.127,41.673 h1.52
  text "PC5" at 11.684,41.546 h1.52
  text "PA15" at 56.007,41.544 h1.52
  text "PA / 14" at 67.818,40.64 h1.52
  text "PB0" at 0.127,39.133 h1.52
  text "PA13" at 56.007,39.003 h1.52
  text "PB1" at 11.684,38.989 h1.52
  text "PA / 12" at 67.818,38.1 h1.52
  text "PB2" at 0.127,36.576 h1.52
  text "PE7" at 11.684,36.449 h1.52
  text "PA11" at 56.007,36.446 h1.52
  text "PA / 10" at 67.818,35.433 h1.52
  text "PE8" at 0.127,34.053 h1.52
  text "PA8" at 67.437,33.972 h1.52
  text "PE9" at 11.684,33.926 h1.52
  text "PA9" at 56.007,33.923 h1.52
  text "PD8" at 31.369,32.021 h1.52
  text "PE10" at 0.127,31.513 h1.52
  text "PC8" at 67.437,31.432 h1.52
  text "PC9" at 56.007,31.383 h1.52
  text "PE11" at 11.684,31.369 h1.52
  text "UART3_TX" at 23.622,30.497 h1.52
  text "PE12" at 0.127,28.956 h1.52
  text "PC6" at 67.437,28.892 h1.52
  text "PE13" at 11.684,28.846 h1.52
  text "PC7" at 56.007,28.843 h1.52
  text "UART3_RX" at 23.622,28.465 h1.52
  text "PD9" at 31.369,26.941 h1.52
  text "PE14" at 0.127,26.416 h1.52
  text "PE15" at 11.684,26.306 h1.52
  text "PD15" at 56.007,26.302 h1.52
  text "PD / 14" at 67.818,25.781 h1.52
  text "PB10" at 0.127,23.893 h1.52
  text "PD13" at 56.007,23.762 h1.52
  text "PB11" at 11.684,23.749 h1.52
  text "PD / 12" at 67.818,23.114 h1.52
  text "PB12" at 0.127,21.336 h1.52
  text "PB13" at 11.684,21.226 h1.52
  text "PD11" at 56.007,21.205 h1.52
  text "PD / 10" at 67.818,20.32 h1.52
  text "PB14" at 0.127,18.796 h1.52
  text "PD8" at 67.437,18.731 h1.52
  text "PB15" at 11.684,18.686 h1.52
  text "PD9" at 56.007,18.682 h1.52
  text "5V" at 0.127,16.273 h1.52
  text "3.3V" at 67.437,16.191 h1.52
  text "5V" at 11.684,16.146 h1.52
  text "3.3V" at 56.007,16.142 h1.52
  text "Y" at 40.99,10.291 h1.52 r90
  text "5V" at 2.54,9.186 h3.81
  text "3.3V" at 62.357,9.059 h3.81
  text "X" at 45.435,6.99 h1.52
  text "Designed by" at 10.541,3.682 h2.54
  text "Chenjd" at 10.541,1.142 h2.54

## Text inside footprints (layer, text, board x,y; h text height)
P1: Top Overlay "Y" at 29.972,59.435 h1.52 r90; Top Overlay "X" at 34.417,56.134 h1.52; Top Overlay "AD0" at 39.353,64.516 h1.52 r90; Top Overlay "VCC" at 26.526,64.644 h1.52 r90; Top Overlay "GND" at 29.193,64.516 h1.52 r90; Top Overlay "SDA" at 31.733,64.516 h1.52 r90; Top Overlay "CLK" at 34.273,64.516 h1.52 r90; Top Overlay "INT" at 36.957,64.516 h1.52 r90
U1: Top Overlay "Y" at 30.099,39.623 h1.52 r90; Top Overlay "X" at 34.544,36.322 h1.52